# Altium PCB top_pcb.PcbDoc
Units mil, origin at the board's own origin, x right, y up, seen from the top; angles counter-clockwise.
Board outline 1559.84 x 1559.84 mil, 4 copper layers (Top Layer, GND_layer, Power_Layer, Bottom Layer); 111 components, 106 nets, 539 pads, 2 vias.
Unrouted connection lines stored in the file: 347.
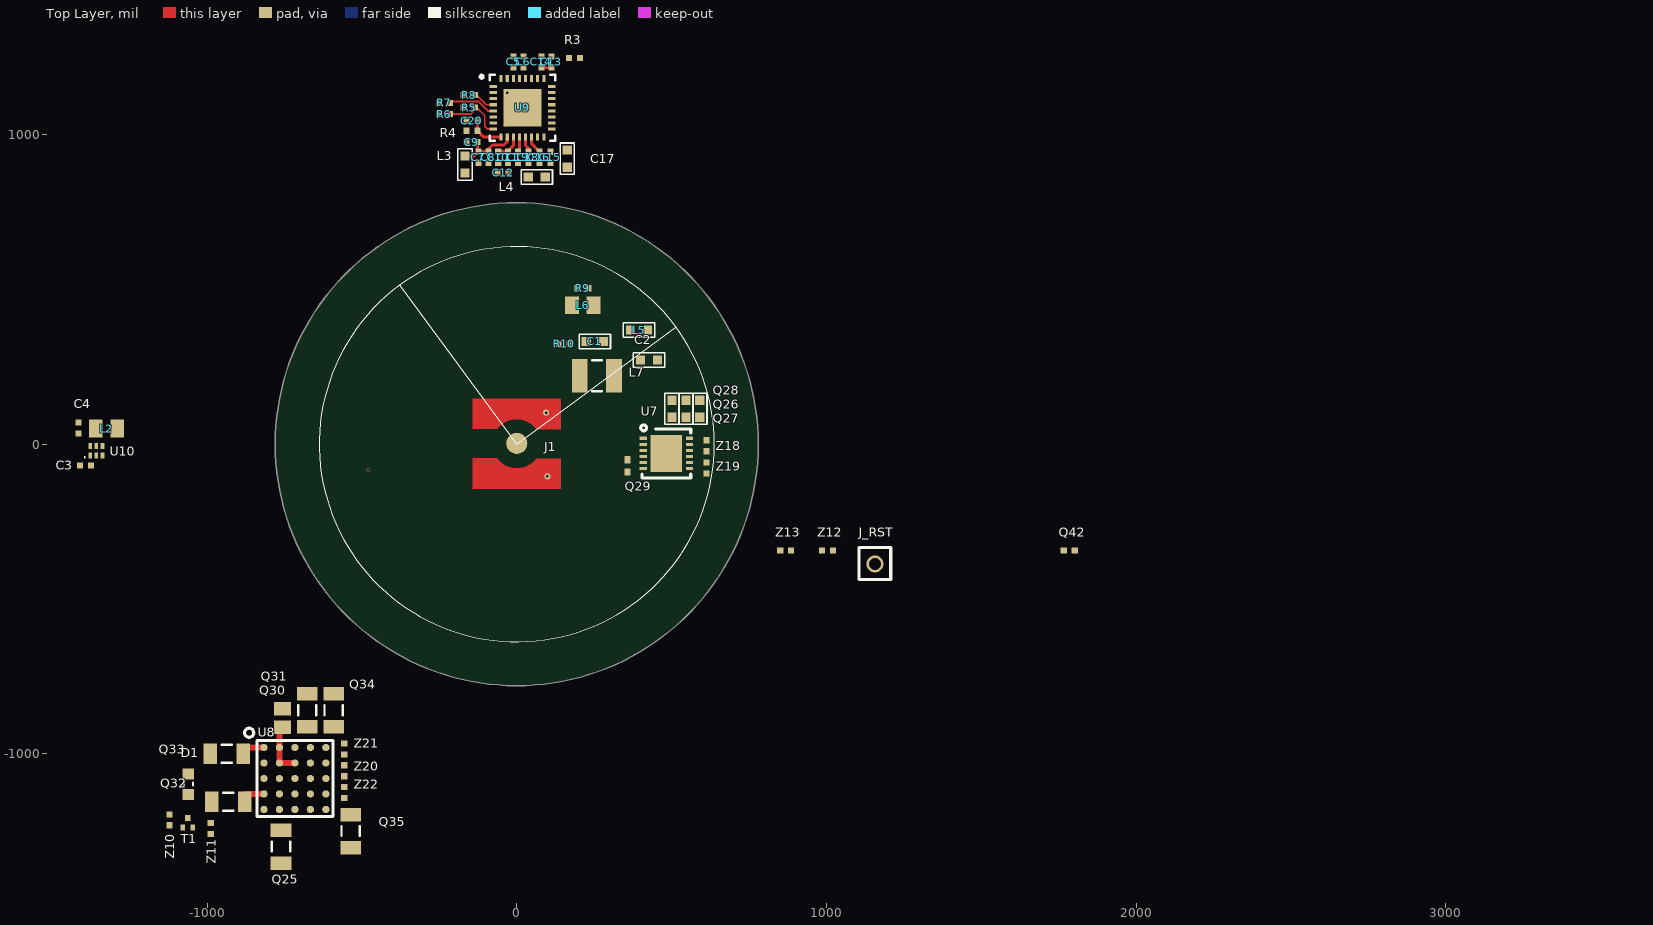
[diagram p0: Top Layer view]
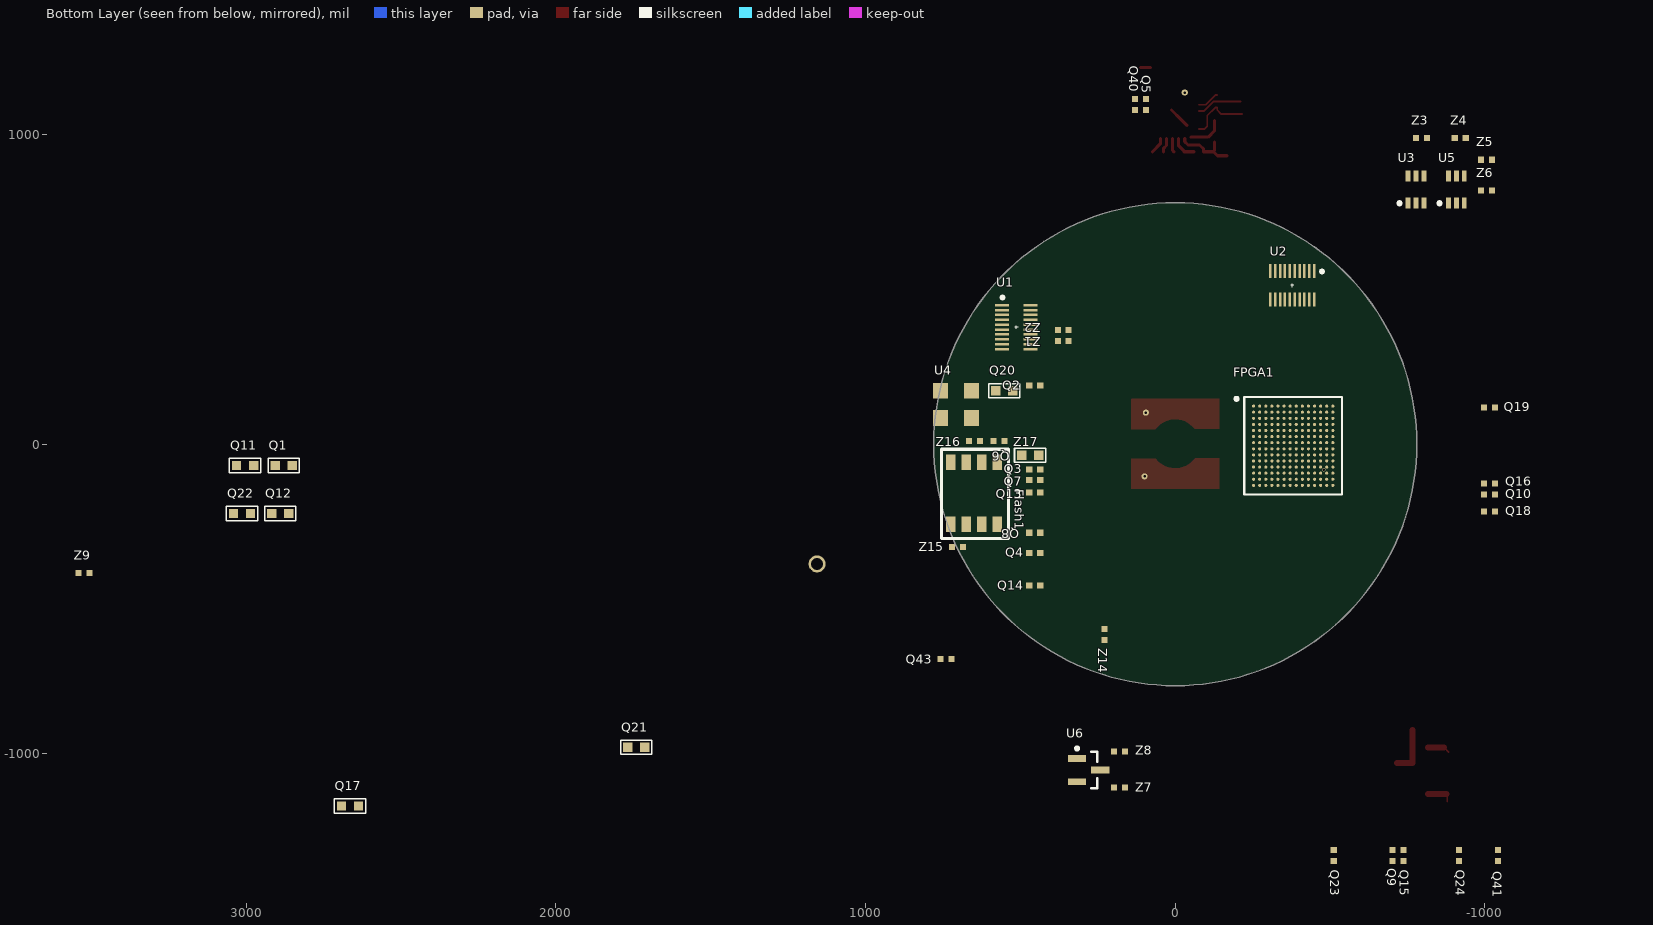
[diagram p1: Bottom Layer view, seen from below]
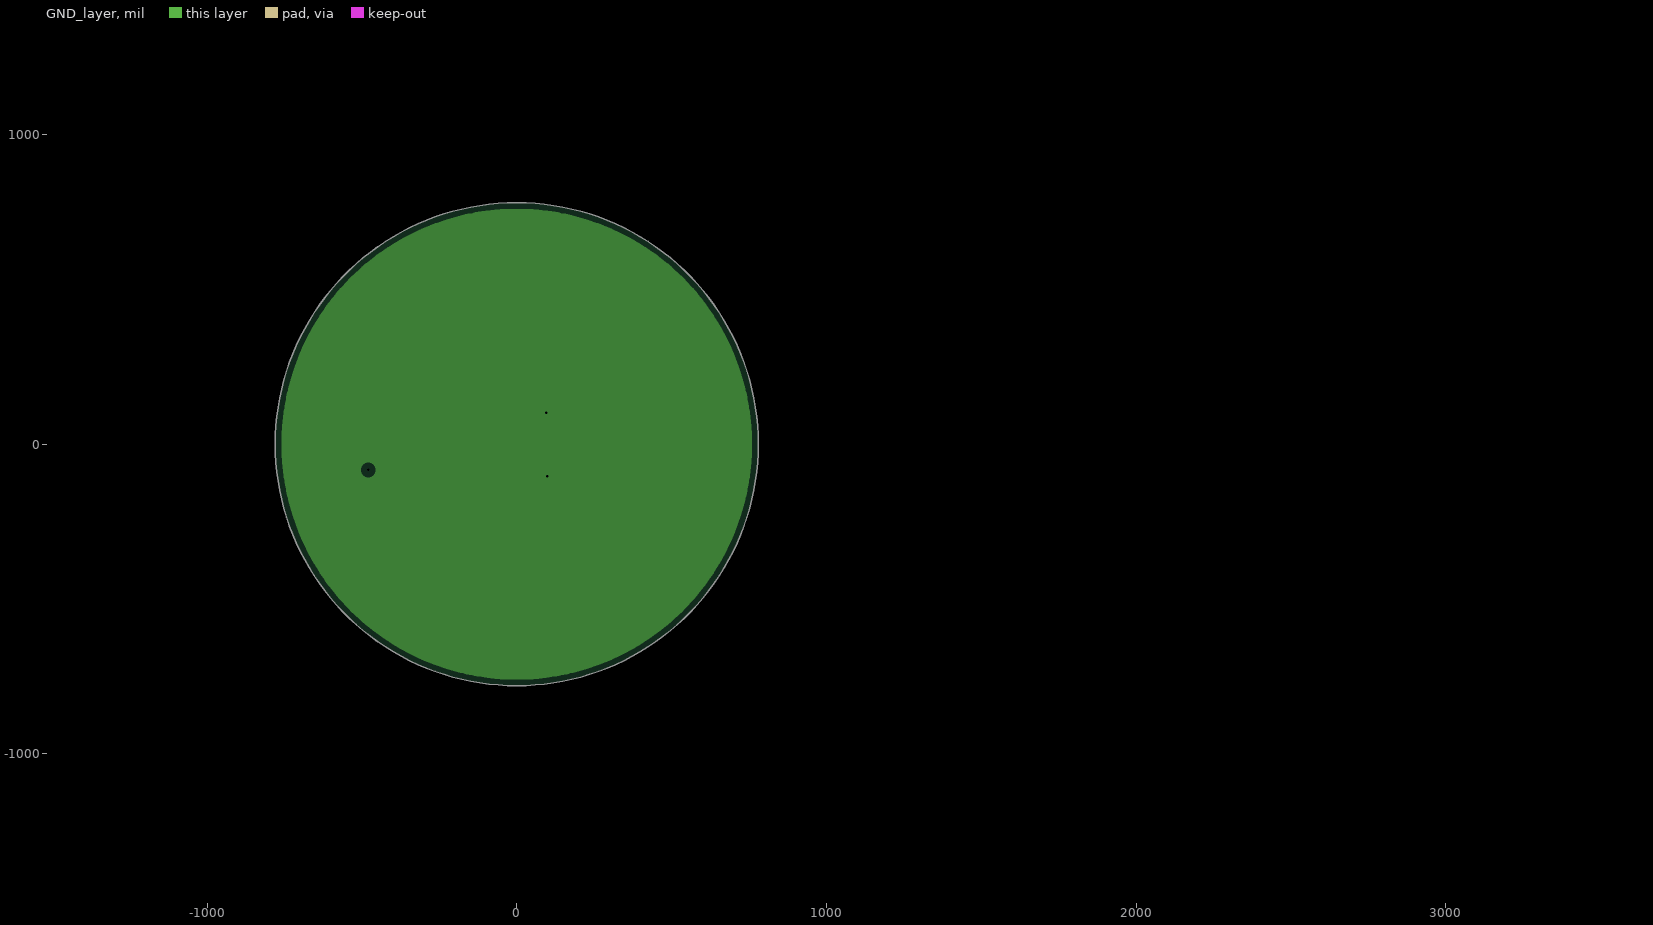
[diagram p2: GND_layer, clearances drawn from the general rule]
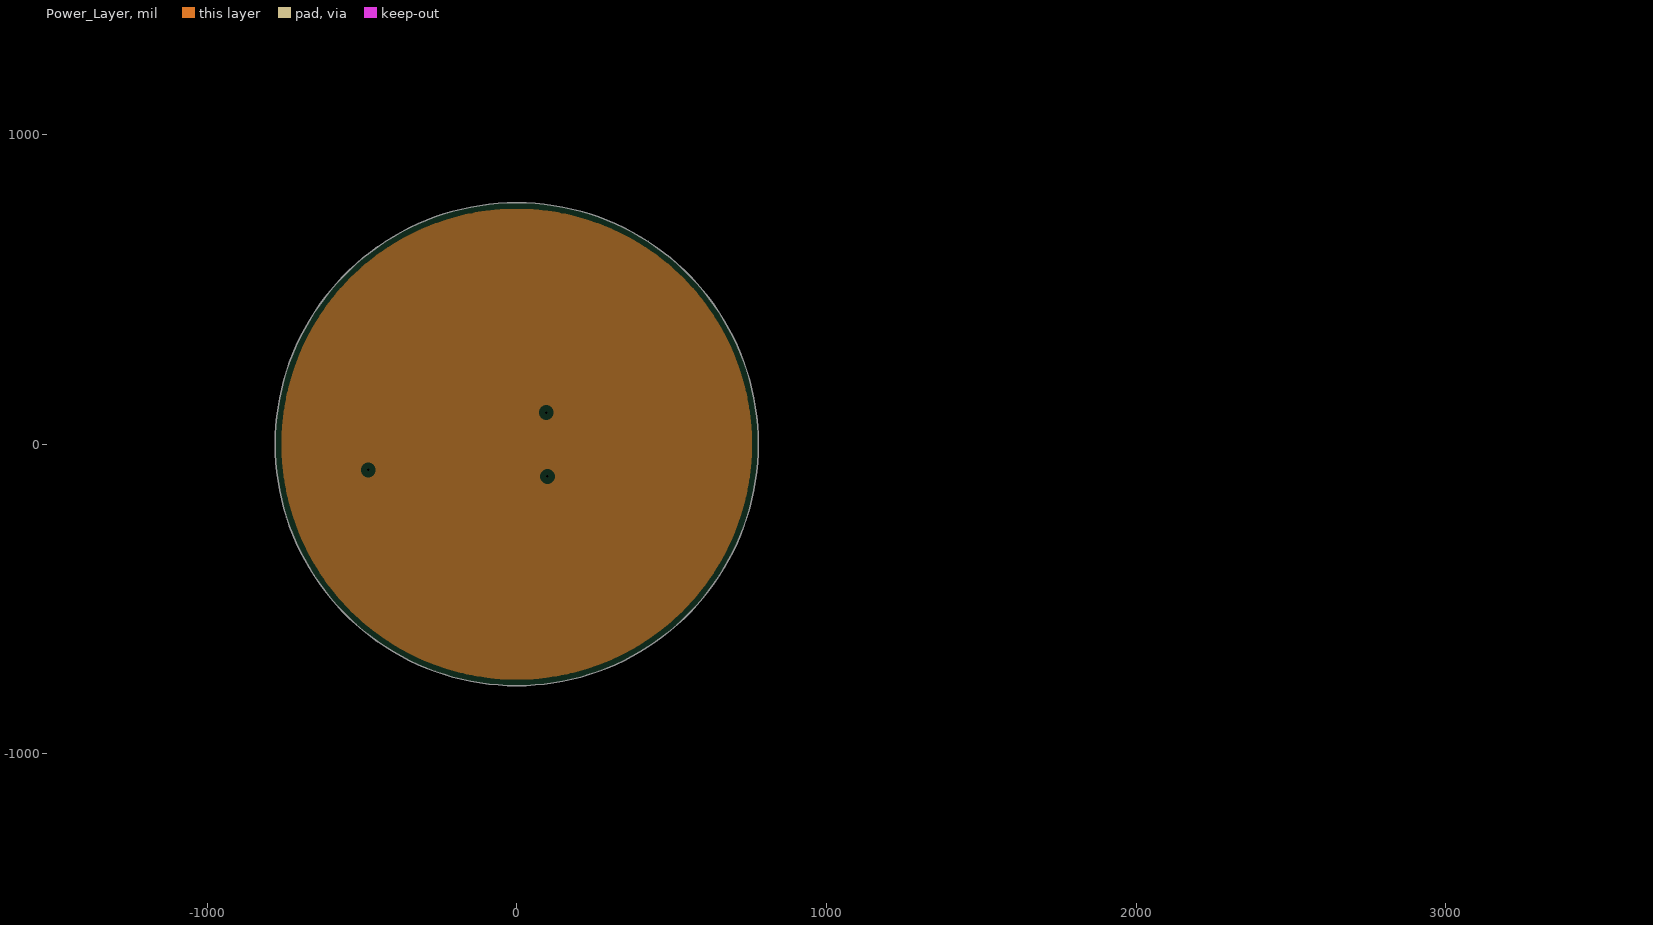
[diagram p3: Power_Layer, clearances drawn from the general rule]

## Layer stack, top to bottom
Top Layer: signal copper 1.4
Dielectric: core 12.6, FR-4, Dk 4.8
GND_layer: plane copper 1.4, net GND
Dielectric: prepreg 12.6, FR-4, Dk 4.8
Power_Layer: plane copper 1.4, net VDD18
Dielectric: core 12.6, FR-4, Dk 4.8
Bottom Layer: signal copper 1.4

## Board outline
-780.04,0 ccw(c-0.12,0) -0.12,-779.93 ccw(c-0.12,0) 779.8,0 ccw(c-0.12,0) -0.12,779.92 ccw(c-0.12,0)

## Design rules (kind name [scope] priority, off if disabled: settings)
Clearance [All] p1: gap=4
HoleSize [All] p1: absolutevalues=TRUE maxlimit=255.91 minlimit=7.87 maxpercent=80.000 minpercent=20.000
MinimumAnnularRing [All] p1: minimumring=4
MinimumSolderMaskSliver [All] p1: minsoldermaskwidth=5.12
PlaneClearance [All] p1: clearance=20
PlaneConnect [All] p1: planeconnectstyle=Direct reliefexpansion=20 reliefentries=4 reliefconductorwidth=10 reliefairgap=10
PolygonConnect [All] p1: connectstyle=Direct reliefconductorwidth=10 reliefentries=4 polygonreliefangle="90 Angle" airgapwidth=10
RoutingVias [All] p1: holewidth=10 width=22 viastyle="Through Hole" minholewidth=7 minwidth=14 maxholewidth=28 maxwidth=50
SilkToSilkClearance [All] p1: silktosilkclearance=0
SilkToSolderMaskClearance [IsPad] p1: minsilkscreentomaskgap=0 clearancetoexposedcopper=FALSE
SolderMaskExpansion [All] p1: expansion=1
Width [All] p1: maxlimit=100 minlimit=5 preferedwidth=5 minimp=50.000000 maximp=50.000000 favimp=50.000000
22 further rules are at their usual default settings.

## Classes and differential pairs
component class U_coaxial-port: C1 C2 J1 L5 L6 L7 R9 R10
component class U_Headstage_withFPGA_BGA: D1 Flash1 FPGA1 J_RST Q1 Q2 Q3 Q4 Q5 Q6 Q7 Q8 Q9 Q10 Q11 Q12 Q13 Q14 Q15 Q16 Q17 Q18 Q19 Q20 Q21 Q22 Q23 Q24 Q40 Q41 Q42 Q43 T1 U1 U2 U3 U4 U5 U6 Z1 Z2 Z3 Z4 Z5 Z6 Z7 Z8 Z9 Z10 Z11 Z12 Z13 Z14 Z15 Z16 Z17
component class U_power-supplies: C3 C4 L2 Q25 Q26 Q27 Q28 Q29 Q30 Q31 Q32 Q33 Q34 Q35 U7 U8 U10 Z18 Z19 Z20 Z21 Z22
component class U_serial-io: C5 C6 C7 C8 C9 C10 C11 C12 C13 C14 C15 C16 C17 C18 C19 C20 L3 L4 R3 R4 R5 R6 R7 R8 U9
net class DIN[0..11]: DIN0 DIN1 DIN2 DIN3 DIN4 DIN5 DIN6 DIN7 DIN8 DIN9 DIN10 DIN11

## Components (designator, comment, footprint, x,y, rotation, side; value= is the part's Value field where it differs from the comment)
C1 "X7R Ceramic" Cap-0603 253,330 r180 top
C2 "X7R Ceramic" Cap-0603 428,270 r180 top
C3 "X7R Ceramic" Cap_0402 -1399,-67.5 r180 top
C4 "X7R Ceramic" Cap_0402 -1414,57.5 r90 top
C5 "X7R Ceramic" Cap_0402 -8.5,1240.5 r90 top
C6 "X7R Ceramic" Cap_0402 23.5,1240.5 r90 top
C7 "X7R Ceramic" Cap_0402 -125.5,921.04 r270 top
C8 "X7R Ceramic" Cap_0402 -93.5,921.04 r270 top
C9 "X7R Ceramic" Cap_0402 -150.5,977.5 r180 top
C10 "X7R Ceramic" Cap_0402 -61.5,921.04 r270 top
C11 "X7R Ceramic" Cap_0402 -29.5,921.04 r270 top
C12 "X7R Ceramic" Cap_0402 -38.5,875.5 r0 top
C13 "X7R Ceramic" Cap_0402 113.5,1240.5 r90 top
C14 "X7R Ceramic" Cap_0402 81.5,1240.5 r90 top
C15 "X7R Ceramic" Cap_0402 106.5,921.04 r270 top
C16 "X7R Ceramic" Cap_0402 71.5,921.04 r270 top
C17 "X7R Ceramic" Cap-0603 161.5,921.5 r90 top
C18 "X7R Ceramic" Cap_0402 35.5,921.04 r270 top
C19 "X7R Ceramic" Cap_0402 2.5,921.04 r270 top
C20 "X7R Ceramic" Cap_0402 -150.5,1046.5 r180 top
D1 "GREEN" RES_0603 -1060.45,-1097.98 r90 top
Flash1 "M25P16" M25P16-S08N 723.55,-260.95 r180 bottom
FPGA1 "XC6SLX16-2CPG196C" CPG196 -381,-5 r180 bottom
J1 "Coax Connector" SMA_132134-10-ND 0,0 r270 top
J_RST "Header_1PIN" JUMPER1PIN 1101.5,-430.5 r0 top
L2 "Ferrite Bead" LQM21PN2R2MC0D -1334,47.5 r0 top
L3 "Ferrite Bead" BLM18KG601SN1D -173.5,926.5 r270 top
L4 "Ferrite Bead" BLM18KG601SN1D 41.5,856.5 r0 top
L5 "Ferrite Bead" BLM18KG601SN1D 418,375 r180 top
L6 "Ferrite Bead" CIG21L4R7MNE 214,451 r0 top
L7 "Ferrite Bead" CBC3225T101MR 257,221 r180 top
Q1 "X7R Ceramic" Cap-0603 2879.55,-66.95 r180 bottom
Q2 "X7R Ceramic" Cap_0402 459.33,190.74 r0 bottom
Q3 "X7R Ceramic" Cap_0402 459.33,-79.26 r0 bottom
Q4 "X7R Ceramic" Cap_0402 459.33,-349.26 r0 bottom
Q5 "X7R Ceramic" Cap_0402 92.83,1102.24 r90 bottom
Q6 "X7R Ceramic" Cap-0603 469.33,-34.26 r180 bottom
Q7 "X7R Ceramic" Cap_0402 459.33,-114.26 r0 bottom
Q8 "X7R Ceramic" Cap_0402 459.33,-284.26 r0 bottom
Q9 "X7R Ceramic" Cap_0402 -700.17,-1333.76 r270 bottom
Q10 "X7R Ceramic" Cap_0402 -1020.17,-163.76 r180 bottom
Q11 "X7R Ceramic" Cap-0603 3004.55,-66.95 r180 bottom
Q12 "X7R Ceramic" Cap-0603 2891.07,-221.95 r180 bottom
Q13 "X7R Ceramic" Cap_0402 459.33,-154.26 r0 bottom
Q14 "X7R Ceramic" Cap_0402 459.33,-454.26 r0 bottom
Q15 "X7R Ceramic" Cap_0402 -735.17,-1333.76 r270 bottom
Q16 "X7R Ceramic" Cap_0402 -1020.17,-128.76 r180 bottom
Q17 "X7R Ceramic" Cap-0603 2666.07,-1166.95 r180 bottom
Q18 "X7R Ceramic" Cap_0402 -1020.17,-218.76 r180 bottom
Q19 "X7R Ceramic" Cap_0402 -1020.17,116.24 r180 bottom
Q20 "X7R Ceramic" Cap-0603 553.05,174.55 r180 bottom
Q21 "X7R Ceramic" Cap-0603 1741.07,-976.95 r180 bottom
Q22 "X7R Ceramic" Cap-0603 3014.55,-221.95 r180 bottom
Q23 "X7R Ceramic" Cap_0402 -510.17,-1333.76 r270 bottom
Q24 "X7R Ceramic" Cap_0402 -915.17,-1333.76 r270 bottom
Q25 "25V" C1206 -761.5,-1299.5 r90 top
Q26 "Cap Semi" Cap-0603 548,115 r270 top
Q27 "Cap Semi" Cap-0603 593,115 r270 top
Q28 "Cap Semi" Cap-0603 503,115 r270 top
Q29 "" 0402 358,-70 r90 top
Q30 "25V, DNP" C0805 -756.5,-884.5 r270 top
Q31 "25V" C1206 -676.5,-859.5 r270 top
Q32 "16V" C1206 -931.5,-1154.5 r0 top
Q33 "16V" C1206 -936.5,-999.5 r0 top
Q34 "25V" C1206 -591.5,-859.5 r270 top
Q35 "25V" C1206 -536.5,-1249.5 r90 top
Q40 "X7R Ceramic" Cap_0402 127.83,1102.24 r90 bottom
Q41 "X7R Ceramic" Cap_0402 -1040.17,-1333.76 r270 bottom
Q42 "X7R Ceramic" Cap_0402 1790,-344.5 r0 top
Q43 "X7R Ceramic" Cap_0402 734.55,-695.45 r180 bottom
R3 "Res1" Res_0402 186.5,1246.5 r0 top
R4 "Res1" Res_0402 -144.77,1011.5 r0 top
R5 "Res1" Res_0402 -153.5,1086.5 r0 top
R6 "Res1" Res_0402 -233.5,1066.5 r180 top
R7 "Res1" Res_0402 -233.5,1101.5 r0 top
R8 "Res1" Res_0402 -153.5,1126.5 r0 top
R9 "Res1" Res_0402 213,503 r0 top
R10 "Res1" Res_0402 153,325 r180 top
T1 "DTC143EE" VMT3 -1074.98,-1242.98 r0 top
U1 "Hirose-DF40C" DF40 513.5,378 r270 bottom
U2 "Hirose-DF40C" DF40 -378,513.5 r0 bottom
U3 "SN74LVC2G17-DCK Package" SN74LVC2G17-DCK-package -750.45,773.05 r180 bottom
U4 "FXO-HC53100.8" FXO-HC53 758.05,84.55 r180 bottom
U5 "SN74LVC2G17-DCK package" SN74LVC2G17-DCK-package -880.45,773.05 r180 bottom
U6 "LM809M3-3.08" SOT23 279.55,-1052.45 r180 bottom
U7 "LP38798" DFN12 483,-30 r0 top
U8 "LTM4622" LGA5x5 -716.5,-1079.5 r0 top
U9 "DS90UR913A" WQFN32-DS90UB913A 26.5,1081.5 r0 top
U10 "TPS62231DRYT" TPS62231DRYT -1359,-22.5 r0 top
Z1 "Res1" Res_0402 379.33,350.74 r270 bottom
Z2 "Res1" Res_0402 344.33,350.74 r90 bottom
Z3 "Res1" Res_0402 -795.46,988.05 r180 bottom
Z4 "Res1" Res_0402 -920.46,988.05 r180 bottom
Z5 "Res1" Res_0402 -1005.45,918.05 r180 bottom
Z6 "Res1" Res_0402 -1005.45,818.05 r180 bottom
Z7 "Res1" Res_0402 179.55,-1107.45 r0 bottom
Z8 "Res1" Res_0402 179.55,-992.45 r180 bottom
Z9 "Res1" Res_0402 3524.54,-416.95 r180 bottom
Z10 "Res1" Res_0402 -1120.45,-1212.97 r90 top
Z11 "Res1" Res_0402 -987.5,-1240.5 r90 top
Z12 "Res1" Res_0402 1003.5,-343.5 r0 top
Z13 "Res1" Res_0402 868.5,-343.5 r0 top
Z14 "Res1" Res_0402 229.33,-614.26 r270 bottom
Z15 "Res1" Res_0402 703.55,-330.95 r0 bottom
Z16 "Res1" Res_0402 648.55,9.05 r180 bottom
Z17 "Res1" Res_0402 568.55,9.05 r180 bottom
Z18 "Res1" Res_0402 613,-5 r90 top
Z19 "Res1" Res_0402 613,-77 r90 top
Z20 "DNP" Res_0402 -556.5,-1054.5 r90 top
Z21 "649k (DNP)" Res_0402 -556.5,-984.5 r90 top
Z22 "" Res_0402 -557.87,-1124.5 r270 top

## Footprints (in the part's own frame and the unit in brackets; to place one, negate y for a bottom-side part, rotate by r counter-clockwise, add the part's x,y. Pads: shape width x height; smd on the part's side, far side on the other; paste and mask are expansions set on the pad)
0402 [mm] "Chip Capacitor, Body 1.0x0.5mm, IPC High Density"
  rect 0.6x0.5 smd: 1(-0.5,0) 2(0.5,0)
  body extent -0.55,-0.3 0.55,0.3, height 1.3
BLM18KG601SN1D [mil]
  rect 30x30 smd: 1(50.93,6.25) 2(-4.07,6.25)
  silkscreen extent -27,-17 74,29, body extent -8,-9 55,21, height 19
C0805 [mm] "Chip Capacitor, Body 2.0x1.3mm, IPC High Density"
  rect 1.1x1.4 smd: 1(-0.75,0) 2(0.75,0)
  body extent -1.1,-0.72 1.1,0.72, height 1.4
C1206 [mm] "Chip Capacitor, Body 3.2x1.6mm, IPC High Density"
  rect 1.1x1.7 smd: 1(-1.35,0) 2(1.35,0)
  silkscreen extent -0.4,-0.75 0.4,0.75, body extent -1.7,-0.9 1.7,0.9, height 1.3
Cap-0603 [mil] "0603 Capacitor"
  rect 30x30 smd: 1(-26.74,-1.7) 2(28.26,-1.7)
  silkscreen extent -50,-25 51,21, body extent -31,-17 32,13, height 19
Cap_0402 [mm]
  rect 0.5x0.5 smd: 1(0.305,0.046) 2(-0.595,0.046)
  body extent -0.67,-0.23 0.38,0.32, height 0.5
CBC3225T101MR [mm]
  rect 1.29x2.72 smd: 1(1.362,0.003) 2(-1.448,0.003)
  silkscreen extent -0.44,-1.26 0.36,1.26, body extent -1.74,-1.35 1.66,1.35, height 2.7
CIG21L4R7MNE [mm]
  rect 1.13x1.47 smd: 1(-0.905,-0.056) 2(0.865,-0.056)
  body extent -1.12,-0.78 1.08,0.67, height 1.05
CPG196 [mm] "BGA, 196-Leads, Body 8x8mm, Pitch 0.5mm"
  round 0.25 smd: A1(-3.25,3.25) A2(-2.75,3.25) A3(-2.25,3.25) A4(-1.75,3.25) A5(-1.25,3.25) A6(-0.75,3.25) A7(-0.25,3.25) A8(0.25,3.25) A9(0.75,3.25) A10(1.25,3.25) A11(1.75,3.25) A12(2.25,3.25) A13(2.75,3.25) A14(3.25,3.25) B1(-3.25,2.75) B2(-2.75,2.75) B3(-2.25,2.75) B4(-1.75,2.75) B5(-1.25,2.75) B6(-0.75,2.75) B7(-0.25,2.75) B8(0.25,2.75) B9(0.75,2.75) B10(1.25,2.75) B11(1.75,2.75) B12(2.25,2.75) B13(2.75,2.75) B14(3.25,2.75) C1(-3.25,2.25) C2(-2.75,2.25) C3(-2.25,2.25) C4(-1.75,2.25) C5(-1.25,2.25) C6(-0.75,2.25) C7(-0.25,2.25) C8(0.25,2.25) C9(0.75,2.25) C10(1.25,2.25) C11(1.75,2.25) C12(2.25,2.25) C13(2.75,2.25) C14(3.25,2.25) D1(-3.25,1.75) D2(-2.75,1.75) D3(-2.25,1.75) D4(-1.75,1.75) D5(-1.25,1.75) D6(-0.75,1.75) D7(-0.25,1.75) D8(0.25,1.75) D9(0.75,1.75) D10(1.25,1.75) D11(1.75,1.75) D12(2.25,1.75) D13(2.75,1.75) D14(3.25,1.75) E1(-3.25,1.25) E2(-2.75,1.25) E3(-2.25,1.25) E4(-1.75,1.25) E5(-1.25,1.25) E6(-0.75,1.25) E7(-0.25,1.25) E8(0.25,1.25) E9(0.75,1.25) E10(1.25,1.25) E11(1.75,1.25) E12(2.25,1.25) E13(2.75,1.25) E14(3.25,1.25) F1(-3.25,0.75) F2(-2.75,0.75) F3(-2.25,0.75) F4(-1.75,0.75) F5(-1.25,0.75) F6(-0.75,0.75) F7(-0.25,0.75) F8(0.25,0.75) F9(0.75,0.75) F10(1.25,0.75) F11(1.75,0.75) F12(2.25,0.75) F13(2.75,0.75) F14(3.25,0.75) G1(-3.25,0.25) G2(-2.75,0.25) G3(-2.25,0.25) G4(-1.75,0.25) G5(-1.25,0.25) G6(-0.75,0.25) G7(-0.25,0.25) G8(0.25,0.25) G9(0.75,0.25) G10(1.25,0.25) G11(1.75,0.25) G12(2.25,0.25) G13(2.75,0.25) G14(3.25,0.25) H1(-3.25,-0.25) H2(-2.75,-0.25) H3(-2.25,-0.25) H4(-1.75,-0.25) H5(-1.25,-0.25) H6(-0.75,-0.25) H7(-0.25,-0.25) H8(0.25,-0.25) H9(0.75,-0.25) H10(1.25,-0.25) H11(1.75,-0.25) H12(2.25,-0.25) H13(2.75,-0.25) H14(3.25,-0.25) J1(-3.25,-0.75) J2(-2.75,-0.75) J3(-2.25,-0.75) J4(-1.75,-0.75) J5(-1.25,-0.75) J6(-0.75,-0.75) J7(-0.25,-0.75) J8(0.25,-0.75) J9(0.75,-0.75) J10(1.25,-0.75) J11(1.75,-0.75) J12(2.25,-0.75) J13(2.75,-0.75) J14(3.25,-0.75) K1(-3.25,-1.25) K2(-2.75,-1.25) K3(-2.25,-1.25) K4(-1.75,-1.25) K5(-1.25,-1.25) K6(-0.75,-1.25) K7(-0.25,-1.25) K8(0.25,-1.25) K9(0.75,-1.25) K10(1.25,-1.25) K11(1.75,-1.25) K12(2.25,-1.25) K13(2.75,-1.25) K14(3.25,-1.25) L1(-3.25,-1.75) L2(-2.75,-1.75) L3(-2.25,-1.75) L4(-1.75,-1.75) L5(-1.25,-1.75) L6(-0.75,-1.75) L7(-0.25,-1.75) L8(0.25,-1.75) L9(0.75,-1.75) L10(1.25,-1.75) L11(1.75,-1.75) L12(2.25,-1.75) L13(2.75,-1.75) L14(3.25,-1.75) M1(-3.25,-2.25) M2(-2.75,-2.25) M3(-2.25,-2.25) M4(-1.75,-2.25) M5(-1.25,-2.25) M6(-0.75,-2.25) M7(-0.25,-2.25) M8(0.25,-2.25) M9(0.75,-2.25) M10(1.25,-2.25) M11(1.75,-2.25) M12(2.25,-2.25) M13(2.75,-2.25) M14(3.25,-2.25) N1(-3.25,-2.75) N2(-2.75,-2.75) N3(-2.25,-2.75) N4(-1.75,-2.75) N5(-1.25,-2.75) N6(-0.75,-2.75) N7(-0.25,-2.75) N8(0.25,-2.75) N9(0.75,-2.75) N10(1.25,-2.75) N11(1.75,-2.75) N12(2.25,-2.75) N13(2.75,-2.75) N14(3.25,-2.75) P1(-3.25,-3.25) P2(-2.75,-3.25) P3(-2.25,-3.25) P4(-1.75,-3.25) P5(-1.25,-3.25) P6(-0.75,-3.25) P7(-0.25,-3.25) P8(0.25,-3.25) P9(0.75,-3.25) P10(1.25,-3.25) P11(1.75,-3.25) P12(2.25,-3.25) P13(2.75,-3.25) P14(3.25,-3.25)
  silkscreen extent -4.78,-4 4,4, body extent -4,-4 4,4, height 1.1
DF40 [mm]
  rect 0.2x1.14 smd mask+0.05: 1(-1.8,1.17) 2(-1.4,1.17) 3(-1,1.17) 4(-0.6,1.17) 5(-0.2,1.17) 6(0.2,1.17) 7(0.6,1.17) 8(1,1.17) 9(1.4,1.17) 10(1.8,1.17) 11(1.8,-1.17) 12(1.4,-1.17) 13(1,-1.17) 14(0.6,-1.17) 15(0.2,-1.17) 16(-0.2,-1.17) 17(-0.6,-1.17) 18(-1,-1.17) 19(-1.4,-1.17) 20(-1.8,-1.17)
  silkscreen extent -2.44,-1.13 0.14,0.15
DFN12 [mm]
  rect 0.6x0.25 smd: 1(-1.9,1.25) 2(-1.9,0.75) 3(-1.9,0.25) 4(-1.9,-0.25) 5(-1.9,-0.75) 6(-1.9,-1.25) 7(1.9,-1.25) 8(1.9,-0.75) 9(1.9,-0.25) 10(1.9,0.25) 11(1.9,0.75) 12(1.9,1.25)
  rect 2.6x3 smd: 13(0,0)
  silkscreen extent -2.1,-2 2,2.34
FXO-HC53 [mm]
  rect 1.24x1.29 smd: 1(0,-0.005) 2(2.54,-0.005) 3(2.54,2.245) 4(0,2.245)
JUMPER1PIN [mm]
  round 1.4 hole 1: 0(1.4,1.115)
  silkscreen extent 0.1,-0.18 2.7,2.45
LGA5x5 [mm] "LGA Package  25-Lead (6.25mm × 6.25mm × 1.82mm)"
  round 0.6 smd: A1(-2.54,2.54) A2(-1.27,2.54) A3(0,2.54) A4(1.27,2.54) A5(2.54,2.54) B1(-2.54,1.27) B2(-1.27,1.27) B3(0,1.27) B4(1.27,1.27) B5(2.54,1.27) C1(-2.54,0) C2(-1.27,0) C3(0,0) C4(1.27,0) C5(2.54,0) D1(-2.54,-1.27) D2(-1.27,-1.27) D3(0,-1.27) D4(1.27,-1.27) D5(2.54,-1.27) E1(-2.54,-2.54) E2(-1.27,-2.54) E3(0,-2.54) E4(1.27,-2.54) E5(2.54,-2.54)
  silkscreen extent -4.12,-3.13 3.13,4.12, body extent -3.13,-3.13 3.13,3.13, height 1.82
LQM21PN2R2MC0D [mm]
  rect 1.13x1.47 smd: 1(1.111,0.08) 2(-0.659,0.08)
  body extent -0.87,-0.64 1.33,0.81, height 1.05
M25P16-S08N [mil]
  rect 30x50 smd: 1(-1,2.68) 2(49,2.68) 3(99,2.68) 4(149,2.68) 5(149,202.68) 6(99,202.68) 7(49,202.68) 8(-1,202.68)
  silkscreen extent -31,-44 185,245
Res_0402 [mm]
  rect 0.5x0.5 smd: 1(0.45,0.017) 2(-0.45,0.017)
  body extent -0.53,-0.26 0.52,0.29, height 0.5
RES_0603 [mm]
  rect 0.9x0.95 smd: 1(-0.85,0) 2(0.85,0)
  silkscreen extent -0.1,-0.38 0.1,0.38, body extent -0.85,-0.45 0.85,0.45, height 0.55
SMA_132134-10-ND [mm]
  round 1.73 smd: 0(-0.065,0)
  round 0.5 hole 0.2: 1(-2.591,2.413) 1(2.642,2.515)
  Top Layer region: 3.64,3.592 1.201,3.592 1.201,1.585 1.197,1.58 1.77,0.855 1.963,-0.048 1.738,-0.943 1.14,-1.647 1.14,-1.647 1.14,-3.607 3.629,-3.607 3.64,-3.597
  Top Layer region: -3.708,-3.607 -1.27,-3.607 -1.27,-1.6 -1.266,-1.595 -1.839,-0.871 -2.032,0.033 -1.807,0.928 -1.209,1.632 -1.209,1.632 -1.209,3.592 -3.698,3.592 -3.708,3.581
SN74LVC2G17-DCK-package [mm]
  rect 0.4x0.9 smd mask+0.05: 1(0.047,0.163) 2(0.697,0.163) 3(1.347,0.163) 4(1.347,2.363) 5(0.697,2.363) 6(0.047,2.363)
  silkscreen extent -0.68,0.14 -0.68,0.14
SOT23 [mm] "SOT23, 3-Leads, Body 2.90x2.45mm, Pitch 0.95mm, IPC Medium Density"
  rect 1.5x0.55 smd: 1(-0.95,0.95) 2(-0.95,-0.95) 3(0.95,0)
  silkscreen extent -1.08,-1.5 0.7,1.9, body extent -0.7,-1.5 0.7,1.5, height 1.1
TPS62231DRYT [mm]
  rect 0.3x0.52 smd paste+0 mask+0.05: 1(-0.469,-0.353)
  rect 0.3x0.49 smd paste+0 mask+0.05: 2(0.031,-0.353) 3(0.531,-0.353) 4(0.531,0.417) 5(0.031,0.417) 6(-0.469,0.417)
  silkscreen extent -0.97,-0.54 -0.87,-0.44, body extent -0.72,-0.49 0.78,0.56, height 0.6
VMT3 [mm]
  rect 0.37x0.5 smd: 1(-0.089,0.116) 2(0.711,0.116)
  rect 0.47x0.5 smd: 3(0.311,0.916)
WQFN32-DS90UB913A [mm]
  rect 0.6x0.25 smd mask+0: 1(-2.605,1.873) 2(-2.605,1.373) 3(-2.605,0.873) 4(-2.605,0.373) 5(-2.605,-0.127) 6(-2.605,-0.627) 7(-2.605,-1.127) 8(-2.605,-1.627) 17(2.195,-1.627) 18(2.195,-1.127) 19(2.195,-0.627) 20(2.195,-0.127) 21(2.195,0.373) 22(2.195,0.873) 23(2.195,1.373) 24(2.195,1.873)
  rect 0.25x0.6 smd mask+0: 9(-1.955,-2.277) 10(-1.455,-2.277) 11(-0.955,-2.277) 12(-0.455,-2.277) 13(0.045,-2.277) 14(0.545,-2.277) 15(1.045,-2.277) 16(1.545,-2.277) 25(1.545,2.523) 26(1.045,2.523) 27(0.545,2.523) 28(0.045,2.523) 29(-0.455,2.523) 30(-0.955,2.523) 31(-1.455,2.523) 32(-1.955,2.523)
  rect 3.1x3.1 smd paste-4: 33(-0.205,0.123)
  silkscreen extent -3.68,-2.58 2.49,2.82, body extent -2.76,-2.43 2.34,2.67, height 0.8

## Part data
C1 C2 C3 C4 C5 C6 C7 C8 C9 C10 C11 C12 C13 C14 C15 C16 C17 C18 C19 C20 Q1 Q2 Q3 Q4 Q5 Q6 Q7 Q8 Q9 Q10 Q11 Q12 Q13 Q14 Q15 Q16 Q17 Q18 Q19 Q20 Q21 Q22 Q23 Q24 Q40 Q41 Q42 Q43: library part Cap, "Capacitor"
D1: library part LED3, "Typical BLUE SiC LED"
FPGA1: "Spartan-6 LX 1.2V FPGA, 106 User I/Os, 196-Ball Chip-Scale BGA (0.5mm Pitch), Speed Grade 2, Commercial Grade, Pb-Free"
Q25 Q29 Q31 Q32 Q33 Q34 Q35: library part "Cap Semi", "Capacitor (Semiconductor SIM Model)"
Q26 Q27 Q28: "Capacitor (Semiconductor SIM Model)"
Q30: library part "Cap Pol3", "Polarized Capacitor (Surface Mount)"
R3 R4 R5 R6 R7 R8 R9 R10 Z1 Z2 Z3 Z4 Z5 Z6 Z7 Z8 Z9 Z10 Z11 Z12 Z13 Z14 Z15 Z16 Z17 Z18 Z19: "Resistor"
U3 U5: library part SN74LVC2G17
U7: library part Component_1, "Low Noise Positive LDO"
U9: "DS90UR913ASERIALIZER"
U10: "Buck Step Down Regulator with 2.05 to 6 V Input and 1.8 V Output, -40 to 85 degC, 6-Pin SON (DRY), Green (RoHS & no Sb/Br)"
Z20 Z21 Z22: library part Res1, "Resistor"

## Via types
v1: diameter 11.81/11.81 (per signal layer), hole 7.87, Top Layer to Bottom Layer, 1 vias
v2: diameter 19.68, hole 7.87, Top Layer to Bottom Layer, tented both sides, 1 vias

## Nets (pads, with @x,y where several pads share a name; then routed paths per layer and width w, separated by ;. In a path a pad name is that pad's centre, name@x,y a point inside that pad or via, vN(x,y) a via of type N, cw(c..) or ccw(c..) an arc to the next point about the centre after c; other vN are vias at no path point)
+VCOAX_12V: L5.2 Q25.2 Q30.2 Q31.2 U7.1 U7.2 U7.3 U8.A2 U8.B2 U8.B3 U8.D2 U8.D3 U8.E2 | length 155.5
  Top Layer w20: Q30.2@-766.5,-924.03 U8.A2 U8.B2 U8.B3
AUXIN1_HSA_A: U1.1
AUXIN1_HSA_B: U1.5
AUXIN1_HSB_A: U2.1
AUXIN1_HSB_B: U2.5
AUXIN2_HSA_A: U1.2
AUXIN2_HSA_B: U1.6
AUXIN2_HSB_A: U2.2
AUXIN2_HSB_B: U2.6
AUXIN3_HSA_A: U1.3
AUXIN3_HSA_B: U1.7
AUXIN3_HSB_A: U2.3
AUXIN3_HSB_B: U2.7
AUXOUT_HSA_B: U1.4
AUXOUT_HSB_B: U2.4
C\S\_A+: FPGA1.B5 U1.12
C\S\_A-: FPGA1.A5 U1.11
C\S\_B+: FPGA1.B9 U2.12
C\S\_B-: FPGA1.A9 U2.11
DIN0: FPGA1.F14 U9.19
DIN1: FPGA1.F13 U9.20
DIN2: FPGA1.G14 U9.21
DIN3: FPGA1.G13 U9.22
DIN4: FPGA1.F12 U9.23
DIN5: FPGA1.F11 U9.24
DIN6: FPGA1.E14 U9.26
DIN7: FPGA1.E13 U9.27
DIN8: FPGA1.D14 U9.29
DIN9: FPGA1.D13 U9.30
DIN10: FPGA1.C13 U9.31
DIN11: FPGA1.C12 U9.32
GCLK: FPGA1.F1 Q20.2 U4.3
GLOBALRESET: FPGA1.K2 J_RST.0
GND: C1.1 C2.1 C3.1 C4.1 C5.1 C6.1 C7.1 C8.1 C9.1 C10.1 C11.1 C12.1 C13.1 C14.1 C15.1 C16.1 C17.1 C20.1 Flash1.4 FPGA1.A1 FPGA1.A14 FPGA1.C2 FPGA1.C3 FPGA1.C6 FPGA1.C7 FPGA1.D5 FPGA1.D6 FPGA1.D9 FPGA1.D10 FPGA1.E8 FPGA1.E11 FPGA1.F7 FPGA1.F8 FPGA1.G4 FPGA1.G5 FPGA1.G6 FPGA1.G7 FPGA1.G8 FPGA1.H4 FPGA1.H7 FPGA1.H8 FPGA1.H9 FPGA1.H10 FPGA1.J7 FPGA1.J8 FPGA1.J10 FPGA1.K8 FPGA1.L3 FPGA1.L5 FPGA1.L6 FPGA1.L9 FPGA1.L10 FPGA1.L11 FPGA1.L12 FPGA1.M3 FPGA1.M7 FPGA1.M11 FPGA1.P1 FPGA1.P14 J1.1 Q1.1 Q2.1 Q3.1 Q4.1 Q5.1 Q6.1 Q7.1 Q8.1 Q9.1 Q10.1 Q11.1 Q12.1 Q13.1 Q14.1 Q15.1 Q16.1 Q17.1 Q18.1 Q19.1 Q20.1 Q21.1 Q22.1 Q23.1 Q24.1 Q25.1 Q26.1 Q27.1 Q28.1 Q29.1 Q30.1 Q31.1 Q32.1 Q33.1 Q34.1 Q35.1 Q40.1 Q41.1 Q42.2 Q43.2 R3.2 R6.1 T1.2 U1.8 U1.9 U2.8 U2.9 U3.2 U4.2 U5.2 U6.1 U7.6 U7.7 U7.13 U8.B5 U8.C1 U8.C2 U8.C5 U8.D5 U9.6 U9.7 U9.33 U10.4 Z2.1 Z13.1 Z17.1 Z19.2 Z20.2 Z21.2 Z22.2 | length 69.6
  Top Layer w10: U9.33@-37.41,1030.1 -17.73,1049.78 U9.33@11.8,1079.31
  other v2: -30.8,1135.55
GPO0: FPGA1.K13 U9.15
GPO1: FPGA1.H12 U9.16
GPO2: FPGA1.H11 U9.17
GPO3: FPGA1.H14 U9.18
HS: FPGA1.J11 U9.1
J_TCK: Z4.1
J_TDI: Z3.1
J_TDO: Z6.2
J_TMS: Z5.1
MISO_A1+: FPGA1.B3 U1.18
MISO_A1-: FPGA1.A3 U1.17
MISO_A2+: FPGA1.B4 U1.20
MISO_A2-: FPGA1.A4 U1.19
MISO_B1+: FPGA1.D8 U2.18
MISO_B1-: FPGA1.C8 U2.17
MISO_B2+: FPGA1.B8 U2.20
MISO_B2-: FPGA1.A8 U2.19
MOSI_A+: FPGA1.B7 U1.16
MOSI_A-: FPGA1.A7 U1.15
MOSI_B+: FPGA1.B11 U2.16
MOSI_B-: FPGA1.A11 U2.15
NetC1_2: C1.2 C2.2 L5.1 L7.2 R10.1
NetC7_2: C7.2 C8.2 C9.2 L3.2 U9.10 | length 203.3
  Top Layer w10: L3.2 -166.32,931.5 -136.67,931.5 C7.2 ; C9.2 -127.06,947.86 C7.2 ; U9.10@-30.8,986.85 -30.8,977.07 -41.37,966.5 -78.5,966.5 -91.68,953.31 C8.2 C7.2
NetC15_2: C15.2 C16.2 C17.2 L4.1 U9.14 | length 52.9
  Top Layer w10: U9.14@47.94,986.85 47.94,969.86 C16.2
NetC18_1: C18.1 J1.0 L6.1 R9.2
NetC18_2: C18.2 U9.13 | length 46.1
  Top Layer w10: U9.13@28.26,986.85 28.26,964.74 37.32,955.68 C18.2
NetC19_1: C19.1 R3.1
NetC19_2: C19.2 U9.12 | length 44.1
  Top Layer w10: C19.2 8.57,948.74 U9.12@8.57,986.85
NetC20_2: C20.2 R4.1 U9.9 | length 117.8
  Top Layer w10: C20.2 R4.1 -106.37,991.5 -50.83,991.5 U9.9
NetD1_2: D1.2 Z10.2
NetFPGA1_B2: FPGA1.B2 Z1.1 Z2.2
NetFPGA1_N11: FPGA1.N11 Z9.2
NetL2_1: L2.1 U10.2
NetL6_2: L6.2 L7.1 R9.1 R10.2
NetQ29_2: Q29.2 U7.4
NetQ34_2: Q34.2 U8.A3
NetQ35_2: Q35.2 U8.E5
NetR5_1: R5.1 R6.2 U9.8 | length 202.6
  Top Layer w6: R6.2 -149.18,1065.81 -135.79,1079.21 R5.1 -129.18,1087.18 -103.5,1061.5 -103.5,1026.5 -94.44,1017.44 U9.8
NetU3_1: U3.1 Z3.2
NetU3_3: U3.3 Z4.2
NetU5_1: U5.1 Z5.2
NetU5_4: U5.4 Z6.1
NetU6_2: U6.2 Z8.2
NetU7_8: U7.8 Z18.2 Z19.1
NetU7_9: U7.9 Z18.1
NetU8_A4: U8.A4 Z21.1
NetU8_C4: U8.C4 Z20.1
NetU8_E4: U8.E4 Z22.1
PCLK: FPGA1.H13 U9.3
S_CLOCK: Flash1.6 FPGA1.N13 Z16.1 Z17.2
S_DATA_IN: Flash1.5 FPGA1.P11
S_DATA_OUT: Flash1.2 Z9.1
S_SELCTN: Flash1.1 FPGA1.P2 Z15.1
SCL: FPGA1.J14 R8.1 U9.4 | length 72.6
  Top Layer w6: R8.1 -129.18,1127.18 -98.18,1096.18 U9.4
SCLK_A+: FPGA1.B6 U1.14
SCLK_A-: FPGA1.A6 U1.13
SCLK_B+: FPGA1.B10 U2.14
SCLK_B-: FPGA1.A10 U2.13
SDA: FPGA1.J13 R7.1 U9.5 | length 147.8
  Top Layer w6: R7.1@-211.47,1106.5 -123.5,1106.5 -93.5,1076.5 U9.5
VCC33: Q26.2 Q27.2 Q28.2 Q42.1 Q43.1 U1.10 U2.10 U7.10 U7.11 U7.12
VDD12: FPGA1.E5 FPGA1.E6 FPGA1.E9 FPGA1.E10 FPGA1.F5 FPGA1.F6 FPGA1.F9 FPGA1.F10 FPGA1.J5 FPGA1.J6 FPGA1.J9 FPGA1.K5 FPGA1.K6 FPGA1.K9 FPGA1.K10 Q5.2 Q6.2 Q7.2 Q8.2 Q9.2 Q10.2 Q33.2 U8.A1 U8.B1 | length 73.1
  Top Layer w6: Q33.2@-883.35,-994.5 Q33.2@-868.35,-979.5
  Top Layer w20: Q33.2@-868.35,-979.5 U8.A1
VDD18: C4.2 C5.2 C6.2 C10.2 C11.2 C12.2 L2.2 L3.1 L4.2 R5.2 U9.11 U9.28 U10.6 | length 81.2
  Top Layer w10: C10.2 C11.2 -27.68,947.31 -11.11,963.88 U9.11@-11.11,986.85
VDD33: C3.2 C13.2 C14.2 D1.1 Flash1.3 Flash1.7 Flash1.8 FPGA1.C4 FPGA1.C5 FPGA1.C9 FPGA1.C10 FPGA1.D7 FPGA1.D12 FPGA1.E3 FPGA1.E4 FPGA1.E7 FPGA1.E12 FPGA1.G3 FPGA1.G9 FPGA1.G10 FPGA1.G11 FPGA1.G12 FPGA1.H3 FPGA1.H5 FPGA1.H6 FPGA1.K3 FPGA1.K4 FPGA1.K7 FPGA1.K11 FPGA1.K12 FPGA1.L7 FPGA1.M5 FPGA1.M6 FPGA1.M9 FPGA1.M10 FPGA1.P13 Q1.2 Q2.2 Q3.2 Q4.2 Q11.2 Q12.2 Q13.2 Q14.2 Q15.2 Q16.2 Q17.2 Q18.2 Q19.2 Q21.2 Q22.2 Q23.2 Q24.2 Q32.2 Q40.2 Q41.2 R4.2 R7.2 R8.2 U3.5 U4.1 U4.4 U5.5 U6.3 U8.D1 U8.E1 U9.25 U10.1 U10.3 U10.5 Z1.2 Z7.1 Z11.2 Z12.2 Z14.1 Z15.2 Z16.2 | length 119.2
  Top Layer w6: Q32.2 -878.35,-1131.36 Q32.2@-876.5,-1129.5
  Top Layer w10: C14.2@80.7,1216.03 C14.2 C13.2
  Top Layer w20: Q32.2@-876.5,-1129.5 U8.D1
VS: FPGA1.J12 U9.2
X_DONE: FPGA1.N14 T1.1 Z11.1
X_INIT: FPGA1.N2 Z14.2
X_M1: FPGA1.N9 Z12.1 Z13.2
X_PROG: FPGA1.N1 Z7.2 Z8.1
X_TCK: FPGA1.B13 U3.4
X_TDI: FPGA1.A13 U3.6
X_TDO: FPGA1.C14 U5.3
X_TMS: FPGA1.B14 U5.6
pads on no net: FPGA1.A2 FPGA1.A12 FPGA1.B1 FPGA1.B12 FPGA1.C1 FPGA1.C11 FPGA1.D1 FPGA1.D2 FPGA1.D3 FPGA1.D4 FPGA1.D11 FPGA1.E1 FPGA1.E2 FPGA1.F2 FPGA1.F3 FPGA1.F4 FPGA1.G1 FPGA1.G2 FPGA1.H1 FPGA1.H2 FPGA1.J1 FPGA1.J2 FPGA1.J3 FPGA1.J4 FPGA1.K1 FPGA1.K14 FPGA1.L1 FPGA1.L2 FPGA1.L4 FPGA1.L8 FPGA1.L13 FPGA1.L14 FPGA1.M1 FPGA1.M2 FPGA1.M4 FPGA1.M8 FPGA1.M12 FPGA1.M13 FPGA1.M14 FPGA1.N3 FPGA1.N4 FPGA1.N5 FPGA1.N6 FPGA1.N7 FPGA1.N8 FPGA1.N10 FPGA1.N12 FPGA1.P3 FPGA1.P4 FPGA1.P5 FPGA1.P6 FPGA1.P7 FPGA1.P8 FPGA1.P9 FPGA1.P10 FPGA1.P12 T1.3 U7.5 U8.A5 U8.B4 U8.C3 U8.D4 U8.E3 Z10.1
copper on no net:
  other v1: -479.5,-83

## Polygon pours and split planes (outlines as drawn)
GND on GND_layer (split plane): 209 vertices, not listed, extent -760.02,-759.91 759.79,759.9
VDD18 on Power_Layer (split plane): 209 vertices, not listed, extent -760.02,-759.91 759.79,759.9

## Silkscreen, mask and mechanical layers (free items; w line width, h text height)
Top Overlay:
  circle w1: c0.08,-0.05 r638.03
  lines w1: -378.3,513.9 0,0 513.9,378.3